# EAGLE board firstschematic (EAGLE 7.2.0)
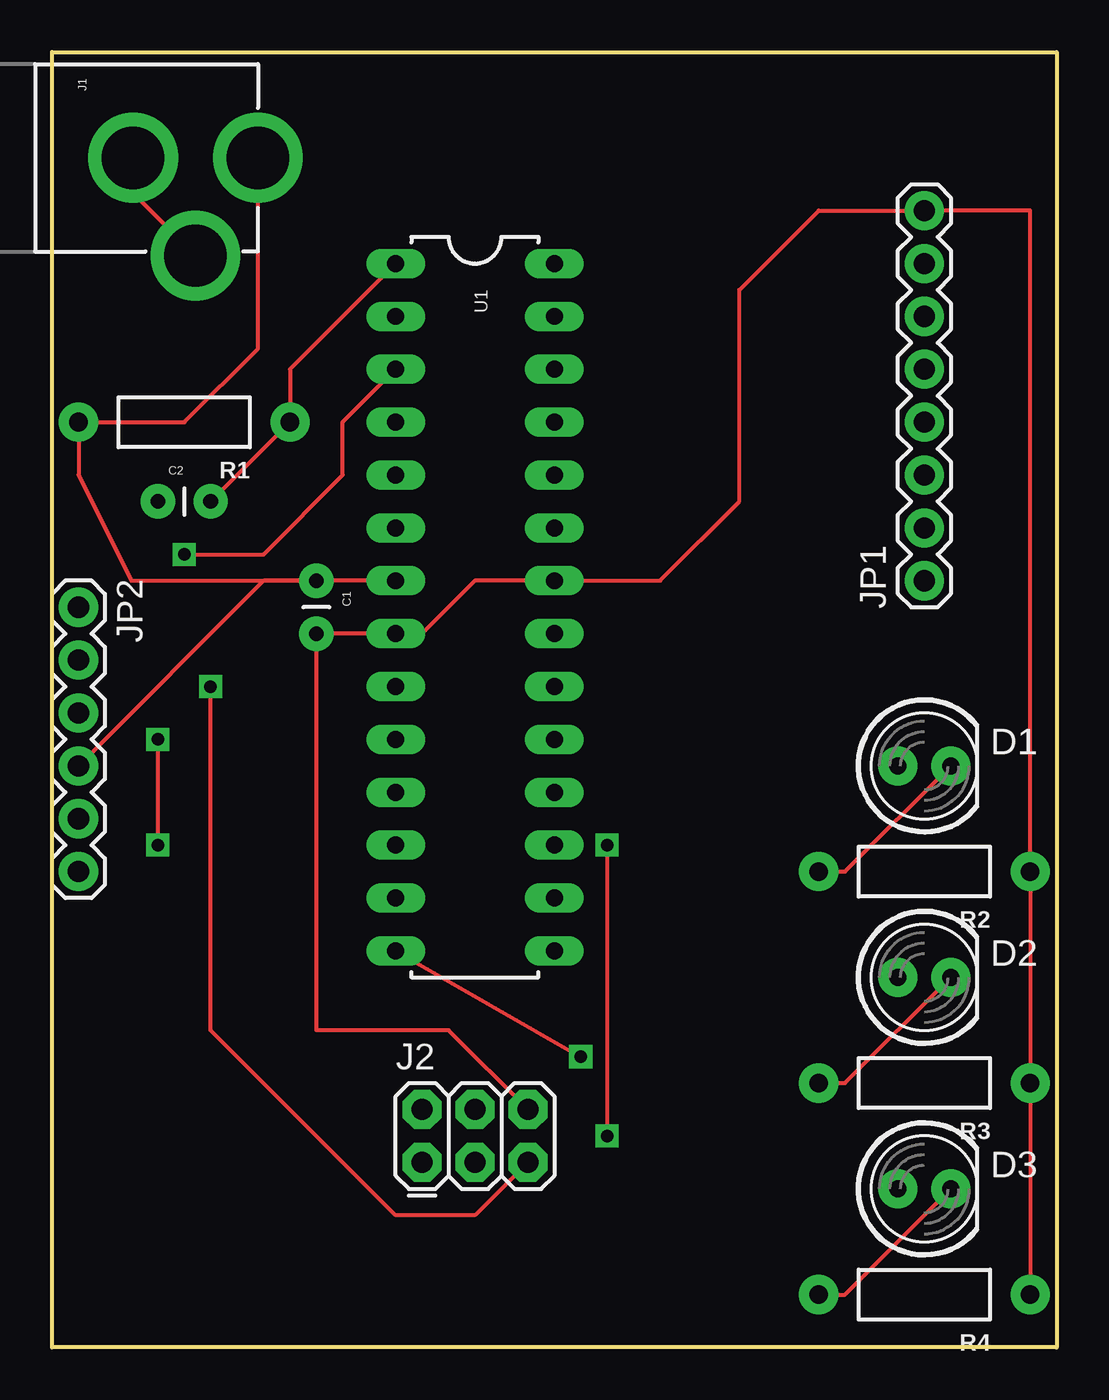
[diagram p0: board, top side]
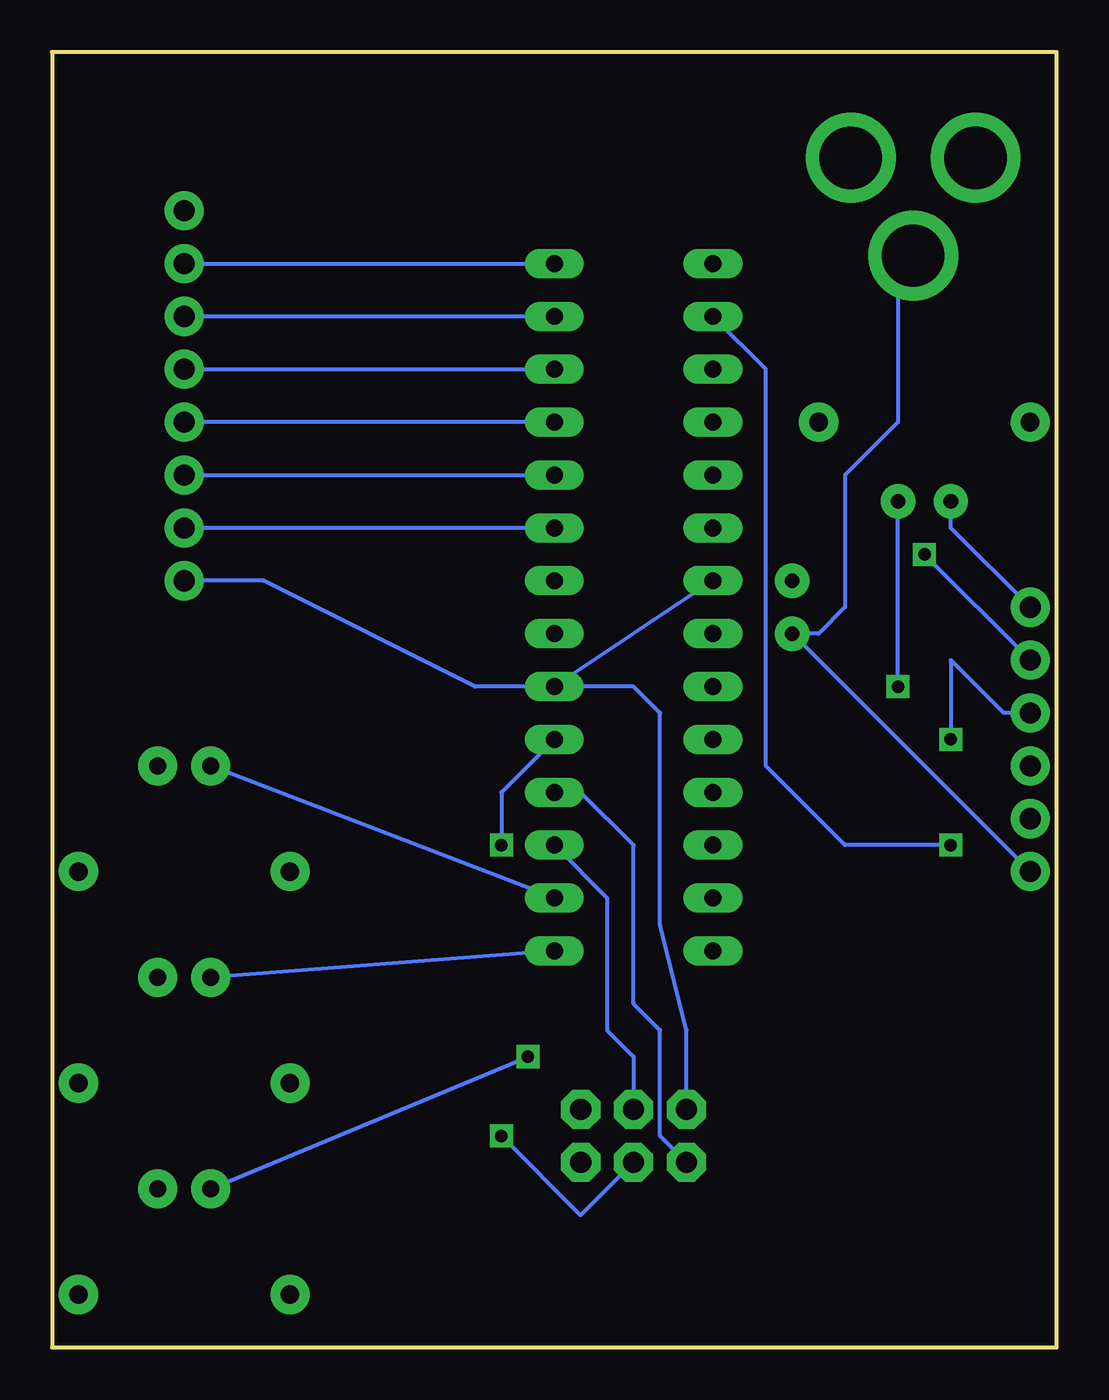
[diagram p1: board, bottom side, seen from below]

Size 48.26 x 62.23 mm. Coordinates in mm from the lower left corner, seen from the top.
Outline: 0,0 0,62.23 48.26,62.23 48.26,0 0,0
Copper layers (1*16): Top 0.035mm / dielectric 1.5mm / Bottom 0.035mm
Design rules "SparkFun": minimum track width 8mil, minimum drill 20mil, track to track 8mil, track to pad 8mil, pad to pad 8mil, via to via 8mil, smd to smd 8mil, copper to edge 8mil, drill to drill 8mil, minimum pad ring 12mil, minimum via ring 10mil, stop-mask expansion 4mil, vias tented up to drill 20mil, thermal gap 10mil

## Footprints (pad centres in the part's own frame; a part is rotated, then mirrored left to right if it is on the bottom)
CAP-PTH-SMALL = drill 0.7 pad 1.651: 1 0,0; 2 2.54,0
LED5MM = drill 0.813 pad 1.88: A -1.27,0; K 1.27,0
POWER_JACK_PTH = drill 2.997 pad 4.318: GND 0,7.7; GNDBREAK 4.7,10.7; PWR 0,13.7
2X3 = drill 1.016 pad 1.88 octagon: 1 0,0; 2 0,2.54; 3 2.54,0; 4 2.54,2.54; 5 5.08,0; 6 5.08,2.54
1X08_ROUND = drill 1.016 pad 1.88: 1 0,0; 2 2.54,0; 3 5.08,0; 4 7.62,0; 5 10.16,0; 6 12.7,0; 7 15.24,0; 8 17.78,0
1X06 = drill 1.016 pad 1.88: 1 0,0; 2 2.54,0; 3 5.08,0; 4 7.62,0; 5 10.16,0; 6 12.7,0
AXIAL-0.4 = drill 0.9 pad 1.88: P$1 -5.08,0; P$2 5.08,0
DIL28-3 = drill 0.813 long: 1 -16.51,-3.81; 2 -13.97,-3.81; 3 -11.43,-3.81; 4 -8.89,-3.81; 5 -6.35,-3.81; 6 -3.81,-3.81; 7 -1.27,-3.81; 8 1.27,-3.81; 9 3.81,-3.81; 10 6.35,-3.81; 11 8.89,-3.81; 12 11.43,-3.81; 13 13.97,-3.81; 14 16.51,-3.81; 15 16.51,3.81; 16 13.97,3.81; 17 11.43,3.81; 18 8.89,3.81; 19 6.35,3.81; 20 3.81,3.81; 21 1.27,3.81; 22 -1.27,3.81; 23 -3.81,3.81; 24 -6.35,3.81; 25 -8.89,3.81; 26 -11.43,3.81; 27 -13.97,3.81; 28 -16.51,3.81

## Placement (x,y rotation side)
C1  [CAP-PTH-SMALL]  12.7,36.83 270 top
C2  [CAP-PTH-SMALL]  5.08,40.64 0 top
D1  [LED5MM]  41.91,27.94 0 top
D2  [LED5MM]  41.91,17.78 0 top
D3  [LED5MM]  41.91,7.62 0 top
J1  POWER_JACKPTH  [POWER_JACK_PTH]  -3.81,57.15 270 top
J2  AVR_SPI_PRG_6PTH  [2X3]  17.78,8.89 0 top
JP1  [1X08_ROUND]  41.91,36.83 90 top
JP2  [1X06]  1.27,35.56 270 top
R1  [AXIAL-0.4]  6.35,44.45 180 top
R2  [AXIAL-0.4]  41.91,22.86 180 top
R3  [AXIAL-0.4]  41.91,12.7 180 top
R4  [AXIAL-0.4]  41.91,2.54 180 top
U1  ATMEGA328P_PDIP  [DIL28-3]  20.32,35.56 270 top

## Library data of the parts
C1 C2 = SparkFun-Capacitors
D1-D3 = SparkFun-LED
J1 = SparkFun-Connectors; PROD_ID: CONN-08197
J2 JP1 JP2 = SparkFun-Connectors
R1-R4 = SparkFun-Resistors
U1 = SparkFun-DigitalIC

## Nets
CTS: JP2.5
DTR: C2.1 JP2.1
GND: C1.2 J1.GND J1.GNDBREAK J2.6 JP1.8 JP2.6 R2.P$1 R3.P$1 R4.P$1 U1.8 U1.22
MISO: J2.1 U1.18
MOSI: J2.4 U1.17
N$1: D1.K R2.P$2
N$2: D3.A U1.14
N$3: D2.A U1.15
N$4: D1.A U1.16
N$5: D2.K R3.P$2
N$6: D3.K R4.P$2
N$8: JP1.2 U1.23
N$9: JP1.3 U1.24
N$10: JP1.4 U1.25
N$11: JP1.5 U1.26
N$12: JP1.6 U1.27
N$13: JP1.7 U1.28
RESET: C2.2 J2.5 R1.P$1 U1.1
RX: JP2.3 U1.2
SCK: J2.3 U1.19
TX: JP2.2 U1.3
VCC: C1.1 J1.PWR J2.2 JP1.1 JP2.4 R1.P$2 U1.7 U1.20

## Tracks (layer width: path | path; a pad name or v marks a point on that pad's centre or on a via)
DTR
  Bottom 0.203: JP2.1 5.08,39.37 C2.1
GND
  Top 0.203: R4.P$1 R3.P$1 R2.P$1 46.99,54.61 JP1.8 36.83,54.61 33.02,50.8 33.02,40.64 29.21,36.83 U1.22 20.32,36.83 17.78,34.29 U1.8 C1.2 12.7,15.24 19.05,15.24 J2.6 | J1.GNDBREAK 3.89,55.45 J1.GND
  Bottom 0.203: JP2.6 C1.2 11.43,34.29 10.16,35.56 10.16,41.91 7.62,44.45 7.62,51.72 J1.GNDBREAK
MISO
  Bottom 0.203: J2.1 19.05,10.16 19.05,15.24 20.32,16.51 20.32,24.13 22.86,26.67 U1.18
MOSI
  Bottom 0.203: U1.17 21.59,21.59 21.59,15.24 20.32,13.97 J2.4
N$1
  Top 0.203: R2.P$2 38.1,22.86 D1.K
N$2  (via drill 0.6)
  Top 0.203: v25.4,13.97 U1.14
  Bottom 0.203: D3.A v25.4,13.97
N$3
  Bottom 0.203: U1.15 D2.A
N$4
  Bottom 0.203: U1.16 D1.A
N$5
  Top 0.203: R3.P$2 38.1,12.7 D2.K
N$6
  Top 0.203: R4.P$2 38.1,2.54 D3.K
N$8
  Bottom 0.203: U1.23 JP1.2
N$9
  Bottom 0.203: JP1.3 U1.24
N$10
  Bottom 0.203: U1.25 JP1.4
N$11
  Bottom 0.203: JP1.5 U1.26
N$12
  Bottom 0.203: U1.27 JP1.6
N$13
  Bottom 0.203: JP1.7 U1.28
RESET  (via drill 0.6)
  Top 0.203: J2.5 20.32,6.35 16.51,6.35 7.62,15.24 v7.62,31.75 | U1.1 11.43,46.99 R1.P$1 C2.2
  Bottom 0.203: v7.62,31.75 C2.2
RX  (via drill 0.6)
  Top 0.203: v5.08,29.21 v5.08,24.13
  Bottom 0.203: U1.2 13.97,46.99 13.97,27.94 10.16,24.13 v5.08,24.13 | JP2.3 2.54,30.48 5.08,33.02 v5.08,29.21
SCK  (via drill 0.6)
  Top 0.203: v26.67,24.13 v26.67,10.16
  Bottom 0.203: U1.19 26.67,26.67 v26.67,24.13 | v26.67,10.16 22.86,6.35 J2.3
TX  (via drill 0.6)
  Top 0.203: v6.35,38.1 10.16,38.1 13.97,41.91 13.97,44.45 U1.3
  Bottom 0.203: JP2.2 v6.35,38.1
VCC
  Top 0.203: U1.7 C1.1 | C1.1 10.16,36.83 JP2.4 | C1.1 3.81,36.83 1.27,41.91 R1.P$2 6.35,44.45 9.89,47.99 J1.PWR
  Bottom 0.203: U1.7 U1.20 | U1.20 27.94,31.75 38.1,36.83 JP1.1 | J2.2 17.78,15.24 19.05,20.32 19.05,30.48 20.32,31.75 U1.20